# Altium PCB OpenChill_PCB_01.PcbDoc
Units mm, origin at the board's own origin, x right, y up, seen from the top; angles counter-clockwise.
Board outline 82.55 x 83.31 mm, 2 copper layers (Top Layer, Bottom Layer); 11 components, 10 nets, 41 pads, 0 vias.
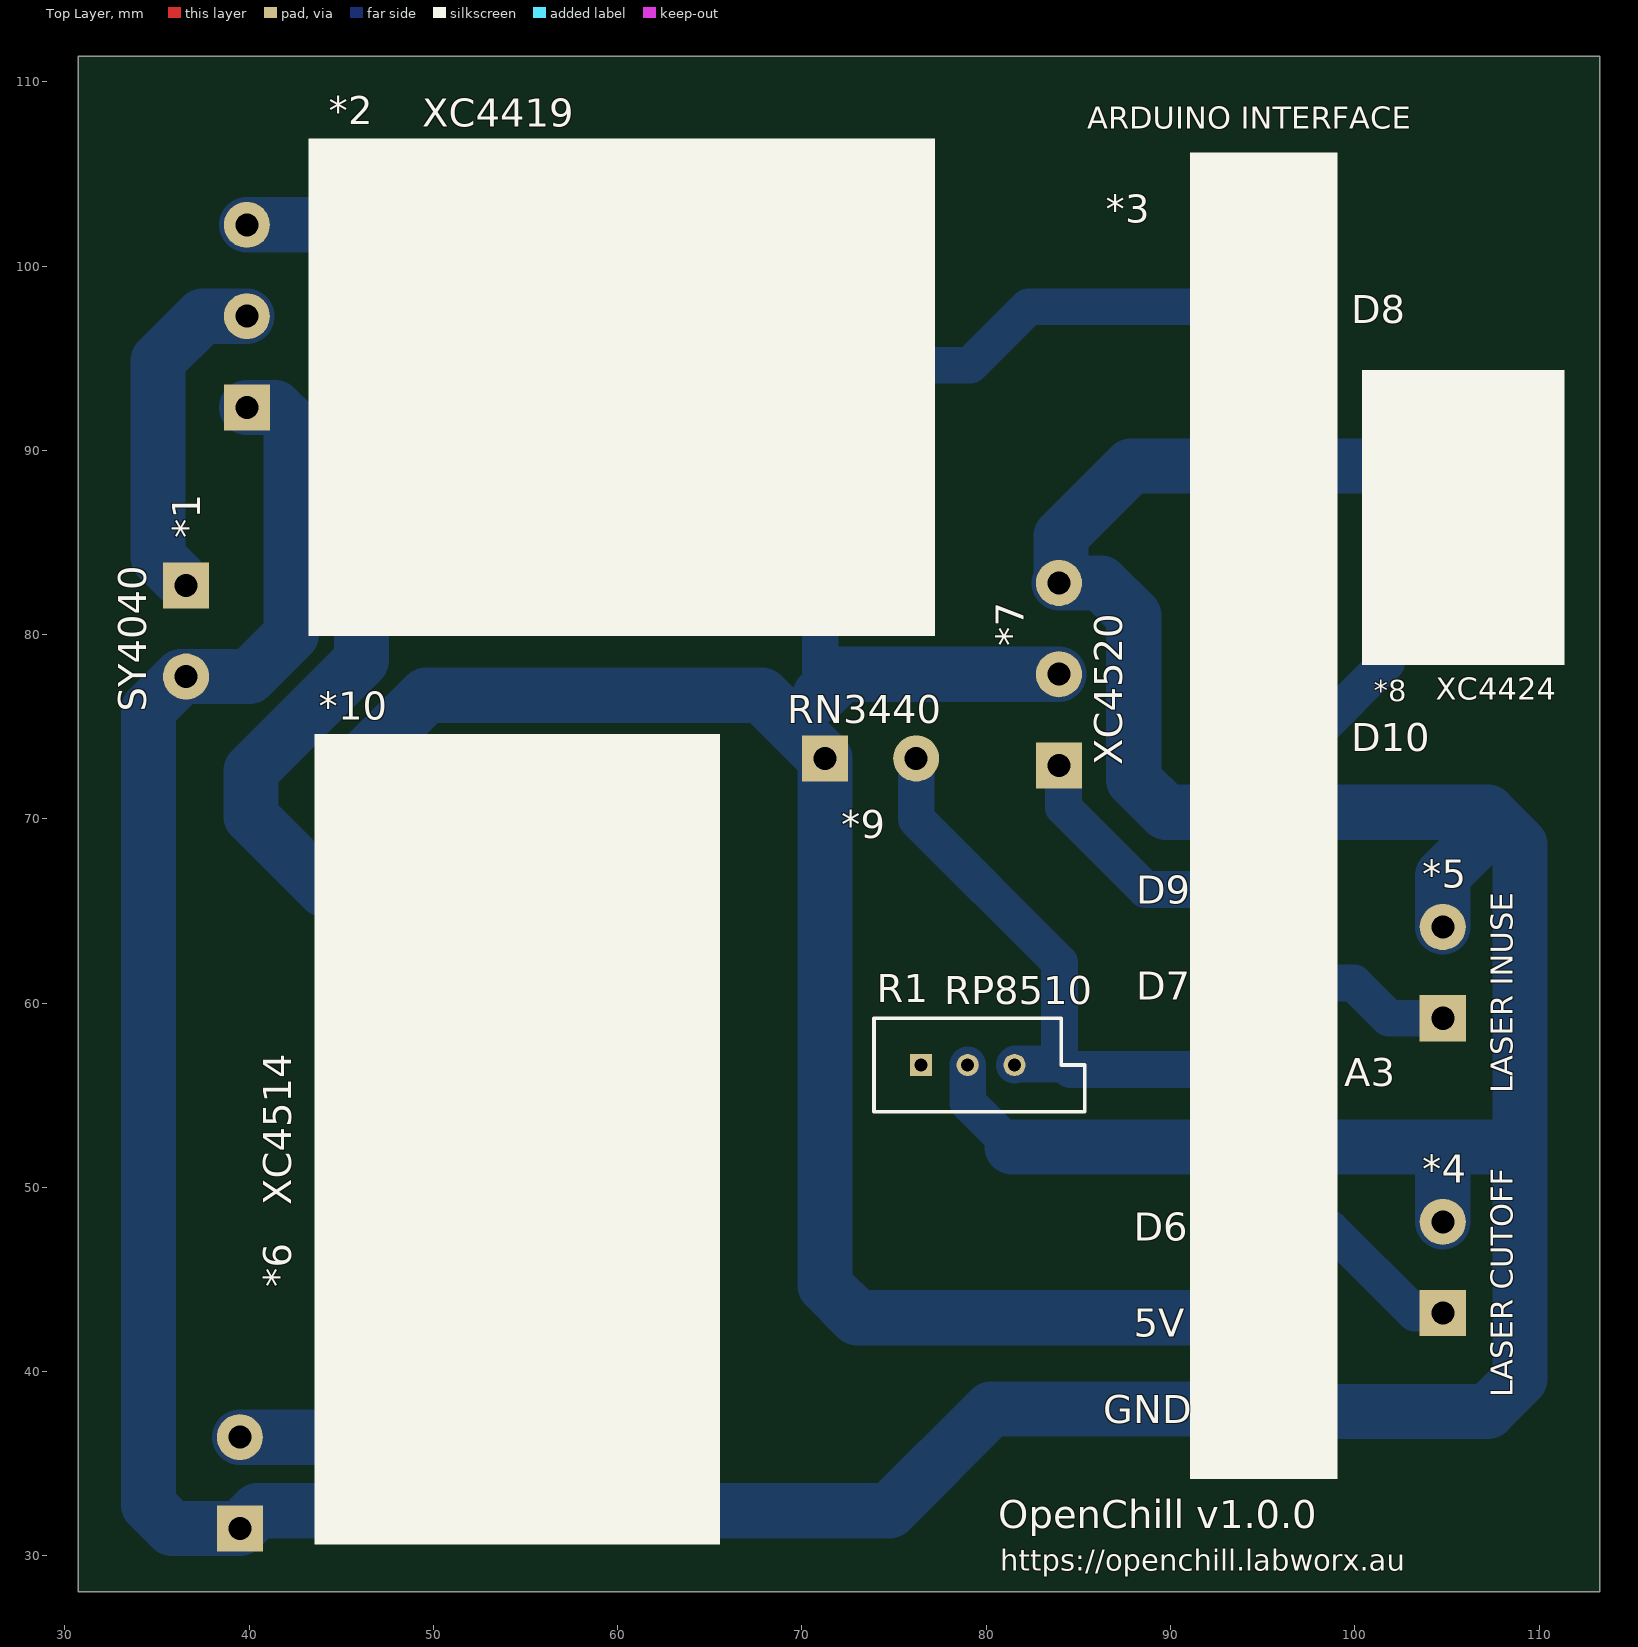
[diagram p0: Top Layer view]
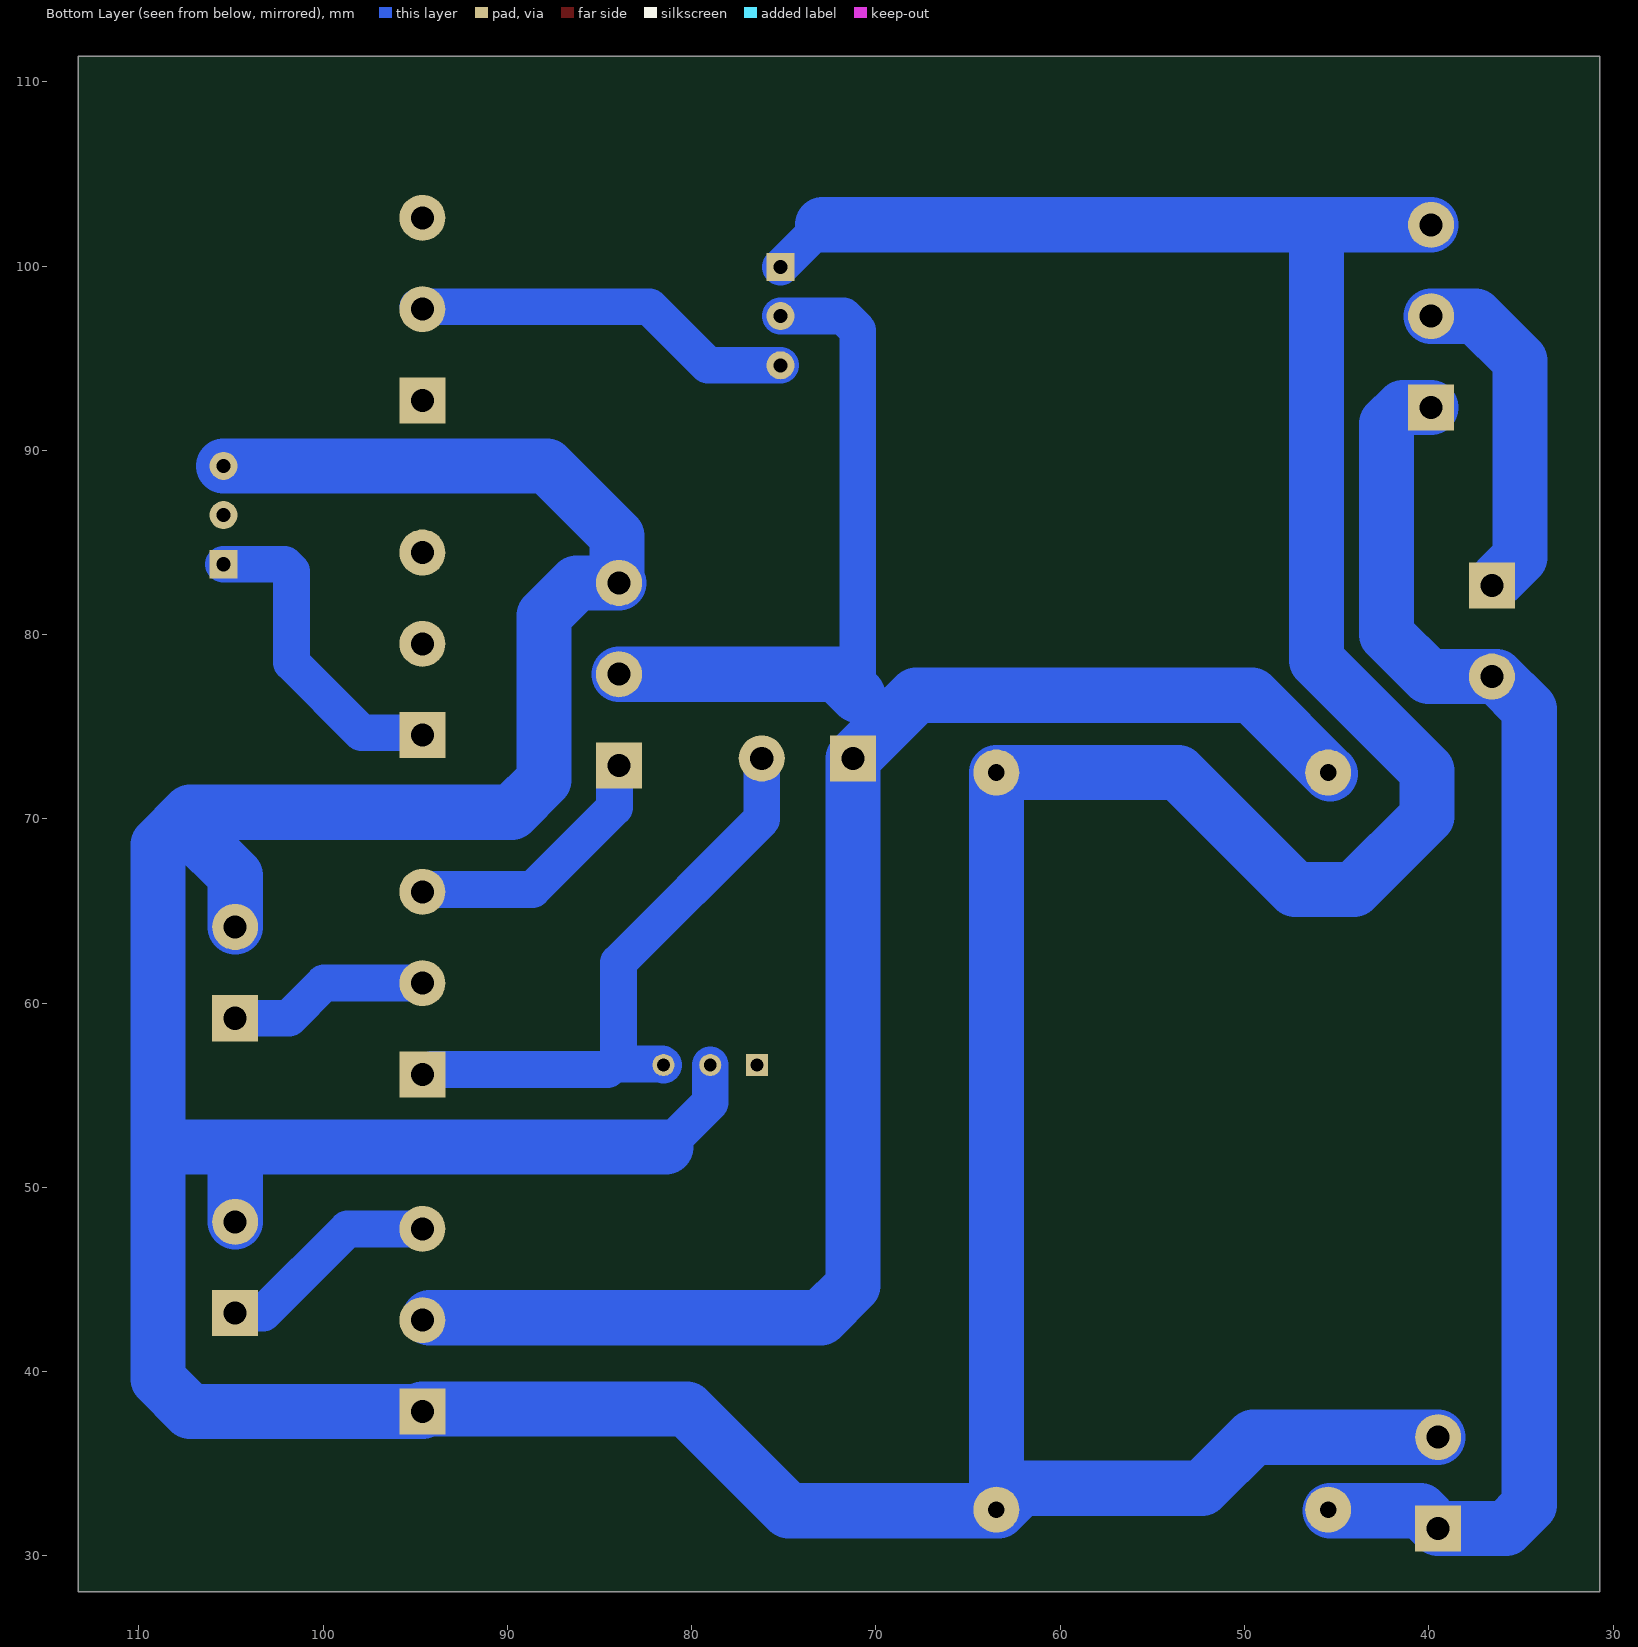
[diagram p1: Bottom Layer view, seen from below]

## Layer stack, top to bottom
Top Solder: solder mask 0.0102, Solder Resist, Dk 3.5
Top Layer: signal copper 0.0356
Dielectric 1: dielectric 0.32, FR-4, Dk 4.8
Bottom Layer: signal copper 0.0356
Bottom Solder: solder mask 0.0102, Solder Resist, Dk 3.5

## Board outline
30.734,28.067 113.284,28.067 113.284,111.379 30.734,111.379

## Design rules (kind name [scope] priority, off if disabled: settings)
Clearance [All] p1: gap=0.254 ignorepadtopadclearanceinfootprint=FALSE except(0: Arc-Hole Track-Hole SMDPad-Hole THPad-Hole Via-Hole Fill-Hole Poly-Hole Region-Hole Text-Hole)
PolygonConnect [All] p1: connectstyle=Relief reliefconductorwidth=0.254 reliefentries=4 polygonreliefangle="90 Angle" airgapwidth=0.254
RoutingVias [All] p1: holewidth=0.711 width=1.27 viastyle="Through Hole" minholewidth=0.711 minwidth=1.27 maxholewidth=0.711 maxwidth=1.27
SolderMaskExpansion [All] p1: expansion=0.102 istentingtop=FALSE
Width [All] p1: maxlimit=3 minlimit=0.254 preferedwidth=0.254 minimp=50.000000 maximp=50.000000 favimp=50.000000
30 further rules are at their usual default settings.

## Components (designator, comment, footprint, x,y, rotation, side; value= is the part's Value field where it differs from the comment)
*1 "HM5172_2WayPCBScrewTerminal" OpenChill_2xThruHole 36.195,83.058 r270 top
*2 "XC4419_Relay_5V" XC4419_5VRelay_Footprint 59.436,93.472 r180 top
*3 "UnoWithWifi" ARDUINO_INTERFACE_FOOTPRINT 95.504,70.231 r90 top
*4 "HM5172_2WayPCBScrewTerminal" OpenChill_2xThruHole 105.156,42.799 r90 top
*5 "HM5172_2WayPCBScrewTerminal" OpenChill_2xThruHole 105.156,58.801 r90 top
*6 "PS0524_BulkheadMaleDCPowerConnector" OpenChill_2xThruHole 39.878,31.115 r90 top
*7 "XC4520_HumiditySensor" OpenChill_3xThruHole 84.328,72.517 r90 top
*8 "XC4424_BuzzerModule" XC4424_BuzzerModule_Footprint 108.839,80.518 r0 top
*9 "RN3440_10k_NTC_Thermistor" OpenChill_2xThruHole 70.866,72.898 r0 top
*10 "XC4514_DCVoltageRegulator" XC4514_VoltReg_Footprint 54.466,52.517 r90 top
R1 "RP8510_10k_POT" VR5 78.994,56.642 r0 top value=1K

## Footprints (in the part's own frame and the unit in brackets; to place one, negate y for a bottom-side part, rotate by r counter-clockwise, add the part's x,y. Pads: shape width x height; smd on the part's side, far side on the other; paste and mask are expansions set on the pad)
ARDUINO_INTERFACE_FOOTPRINT [mm]
  round 2.5 hole 1.25: 8(9.271,0.889) 9(14.224,0.889) 12(32.385,0.889) +5(-27.432,0.889) D6(-22.479,0.889) D7(-9.144,0.889) D8(27.432,0.889) D9(-4.191,0.889)
  rect 2.5x2.5 hole 1.25: 10(22.479,0.889) A3(-14.097,0.889) D10(4.318,0.889) GND(-32.385,0.889)
  silkscreen extent -36.06,-3.56 35.94,4.44
OpenChill_2xThruHole [mm]
  rect 2.5x2.5 hole 1.25: 1(0.381,0.381)
  round 2.5 hole 1.25: 2(5.334,0.381)
OpenChill_3xThruHole [mm]
  rect 2.5x2.5 hole 1.25: 1(0.381,0.381)
  round 2.5 hole 1.25: 2(5.334,0.381) 3(10.287,0.381)
VR5 [mm] "Thru-Hole; 3 Leads"
  rect 1.2x1.2 hole 0.7: 1(-2.54,0)
  round 1.2 hole 0.7: 2(0,0) 3(2.54,0)
  silkscreen extent -5.08,-2.54 6.35,2.54
XC4419_5VRelay_Footprint [mil]
  round 60 hole 30: 5V(-620,-150) SIGNAL(-620,-45)
  round 98.43 hole 49.21: COM(770,-150) NO(770,-345)
  rect 60x60 hole 30: GND(-620,-255)
  rect 98.43x98.43 hole 49.21: NC(770,45)
  silkscreen extent -700,-530 639,533
XC4424_BuzzerModule_Footprint [mil]
  round 60 hole 30: GND(-135,340) NC(-135,235)
  rect 60x60 hole 30: SIG(-135,130)
  silkscreen extent -333,-85 100,545
XC4514_VoltReg_Footprint [mm]
  round 2.5 hole 0.9: 5V+(20,9) GND(-20,-9) GND(20,-9) VCC(-20,9)
  silkscreen extent -21.9,-11.08 22.1,10.92

## Part data
*4: "LASER CUTOFF EMERGENCY"
*5: "LASER ACTIVE"
R1: library part RPot, "Potentiometer", LatestRevisionDate=17-Jul-2002, LatestRevisionNote="Re-released for DXP Platform.", PackageDescription="Variable Resistor, Thru-Hole; 3 Leads", PackageReference=VR5, Published=8-Jun-2000, Publisher="Altium Limited", Set Position=0.5, Sim Note="Enter the Resistance value and the set point into parameter fields."

## Nets (pads, with @x,y where several pads share a name; then routed paths per layer and width w, separated by ;. In a path a pad name is that pad's centre, name@x,y a point inside that pad or via, vN(x,y) a via of type N, cw(c..) or ccw(c..) an arc to the next point about the centre after c; other vN are vias at no path point)
+5: *2.5V *3.+5 *7.2 *9.1 *10.5V+ | length 122.3
  Bottom Layer w0.254: 70.993,76.708 70.993,73.533 *9.1
  Bottom Layer w2: 70.993,76.708 70.993,96.52 71.755,97.282 *2.5V
  Bottom Layer w3: *10.5V+@45.356,72.451 49.613,76.708 67.818,76.708 *9.1@70.993,73.533 ; 70.993,76.708 72.136,77.851 *7.2 ; *9.1 71.247,44.683 73.004,42.926 *3.+5@94.234,42.926
A3: *3.A3 *9.2 R1.3 | length 32.8
  Bottom Layer w2: *9.2 76.2,69.977 83.973,62.204 83.973,56.997 84.264,56.706 ; R1.3 81.597,56.706 84.264,56.706 ; *3.A3@94.234,56.261 94.093,56.402 84.568,56.402 84.264,56.706
D6: *3.D6 *4.1 | length 12.1
  Bottom Layer w2: *3.D6 98.679,47.752 103.251,43.18 *4.1
D7: *3.D7 *5.1 | length 10.9
  Bottom Layer w2: *3.D7 99.949,61.087 101.854,59.182 *5.1
GND: *2.GND *2.NO *3.GND *4.2 *5.2 *6.2 *7.3 *8.GND *10.GND R1.2 | length 347.6
  Bottom Layer w0.254: *7.3 *7.3@84.054,82.911
  Bottom Layer w2: 72.898,102.235 *2.GND ; R1.2 78.994,54.61 81.407,52.197
  Bottom Layer w3: *6.2 49.53,36.449 52.303,33.676 62.131,33.676 63.356,32.451 74.742,32.451 80.264,37.973 *3.GND@94.615,37.973 ; *2.NO 46.101,102.235 ; *10.GND@63.466,32.517 63.466,33.676 63.466,72.517 53.594,72.517 47.244,66.167 44.069,66.167 40.105,70.131 40.105,72.617 46.101,78.613 46.101,102.235 ; 72.898,102.235 46.101,102.235 ; 81.407,52.197 104.775,52.197 108.966,52.197 ; *7.3 86.233,82.804 88.011,81.026 88.011,72.115 89.768,70.358 107.209,70.358 ; *7.3@84.054,82.911 84.054,85.349 87.859,89.154 *8.GND ; *3.GND 107.209,37.846 108.966,39.603 108.966,52.197 ; *4.2 104.775,52.07 104.902,52.197 ; *5.2 104.775,66.929 107.209,69.363 107.209,70.358 ; 107.209,70.358 108.966,68.601 108.966,52.197
Net*1_1: *1.1 *2.COM | length 18.6
  Bottom Layer w0.254: *1.1@36.195,83.058 *1.1
  Bottom Layer w3: *1.1@36.195,83.058 35.052,84.201 35.052,94.869 37.465,97.282 *2.COM
Net*2_SIGNAL: *2.SIGNAL *3.D8 | length 21
  Bottom Layer w2: *2.SIGNAL 79.121,94.615 82.296,97.79 *3.D8@94.869,97.79
Net*3_D9: *3.D9 *7.1 | length 14.3
  Bottom Layer w2: *7.1 84.197,72.648 84.197,70.616 88.646,66.167 *3.D9@94.234,66.167
Net*3_D10: *3.D10 *8.SIG | length 17.2
  Bottom Layer w2: *3.D10@94.869,74.676 97.917,74.676 101.727,78.486 101.727,83.439 102.108,83.82 *8.SIG
VCC: *1.2 *2.NC *6.1 *10.VCC | length 78.6
  Bottom Layer w0.254: *1.2@36.322,77.724 *1.2
  Bottom Layer w3: *1.2@36.322,77.724 34.544,75.946 34.544,32.766 35.814,31.496 *6.1 40.452,32.451 *10.VCC@45.356,32.451 ; *1.2 40.005,77.724 42.291,80.01 42.291,91.44 41.402,92.329 *2.NC
pads on no net: *3.8 *3.9 *3.10 *3.12 *8.NC R1.1

## Silkscreen, mask and mechanical layers (free items; w line width, h text height)
Top Overlay:
  text "XC4419" at 49.403,107.569 h1.52
  text "ARDUINO INTERFACE" at 85.471,107.442 h1.2
  text "D8" at 99.822,96.901 h1.52
  text "XC4424" at 104.394,76.454 h1.2
  text "SY4040" at 34.417,75.819 h1.52 r90
  text "RN3440" at 69.215,75.184 h1.52
  text "D10" at 99.822,73.66 h1.52
  text "XC4520" at 87.376,72.898 h1.52 r90
  text "D9" at 88.138,65.405 h1.52
  text "D7" at 88.138,60.198 h1.52
  text "RP8510" at 77.724,59.944 h1.52
  text "A3" at 99.441,55.499 h1.52
  text "LASER INUSE" at 108.585,55.118 h1.2 r90
  text "XC4514" at 42.291,49.022 h1.52 r90
  text "D6" at 88.011,47.117 h1.52
  text "5V" at 88.011,41.91 h1.52
  text "LASER CUTOFF" at 108.585,38.608 h1.2 r90
  text "GND" at 86.36,37.211 h1.52
  text "OpenChill v1.0.0" at 80.645,31.496 h1.52
  text "https://openchill.labworx.au" at 80.772,29.212 h1.15